# Altium PCB PCB.PcbDoc
Units mm, origin at the board's own origin, x right, y up, seen from the top; angles counter-clockwise.
Board outline 90 x 50 mm, 2 copper layers (Top Layer, Bottom Layer); 18 components, 14 nets, 63 pads, 2 vias.
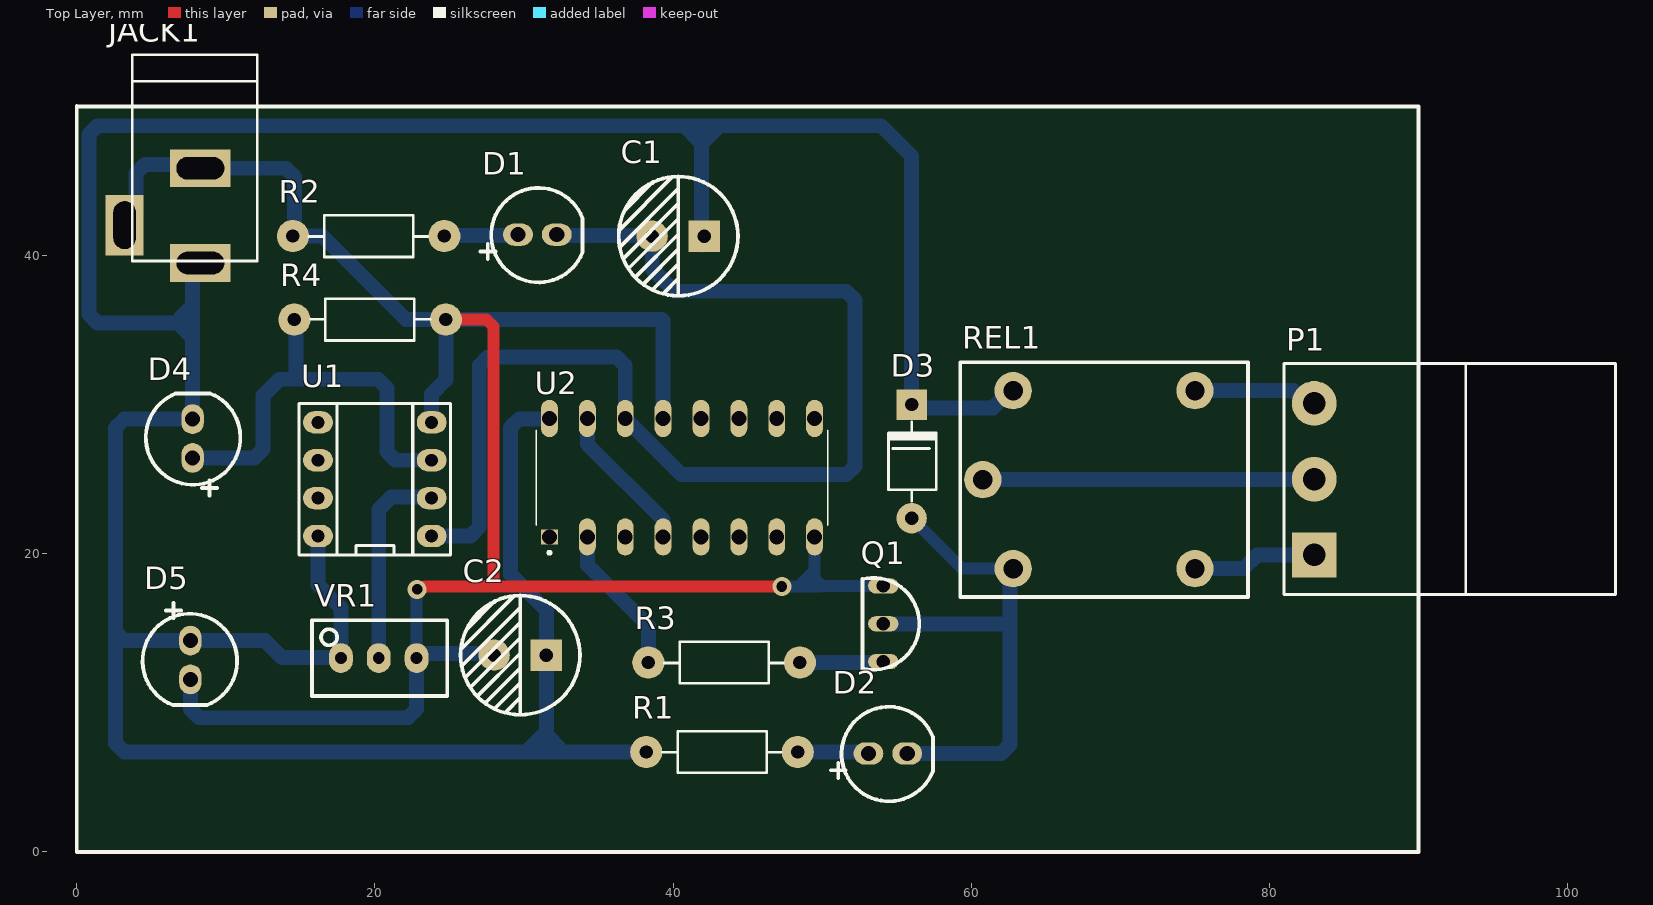
[diagram p0: Top Layer view]
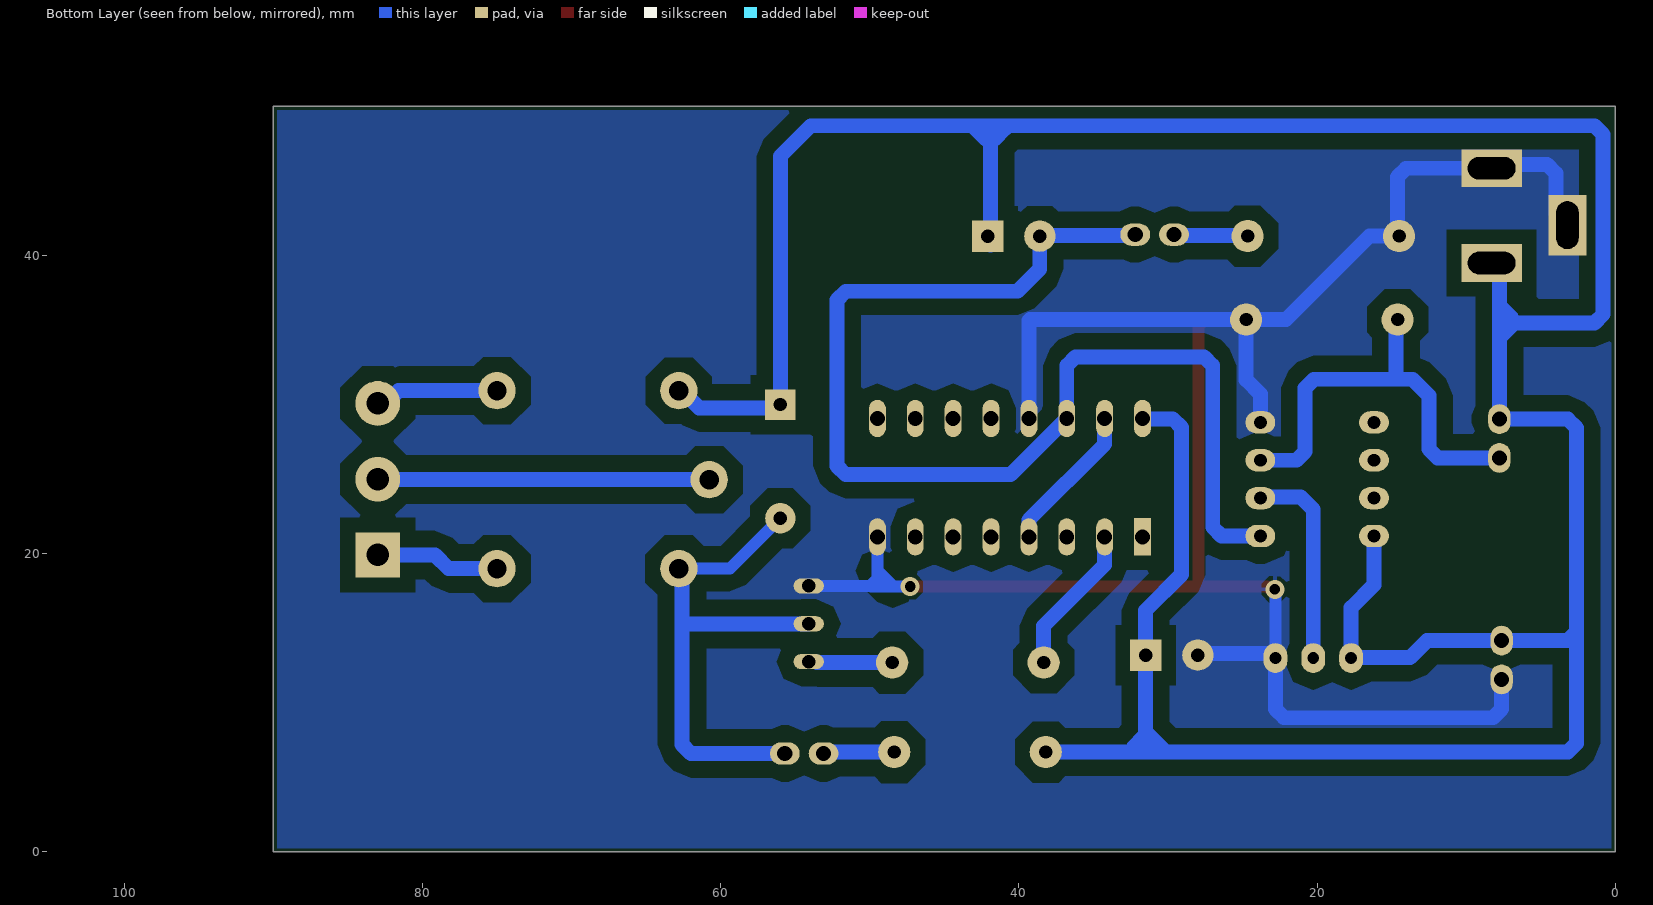
[diagram p1: Bottom Layer view, seen from below]
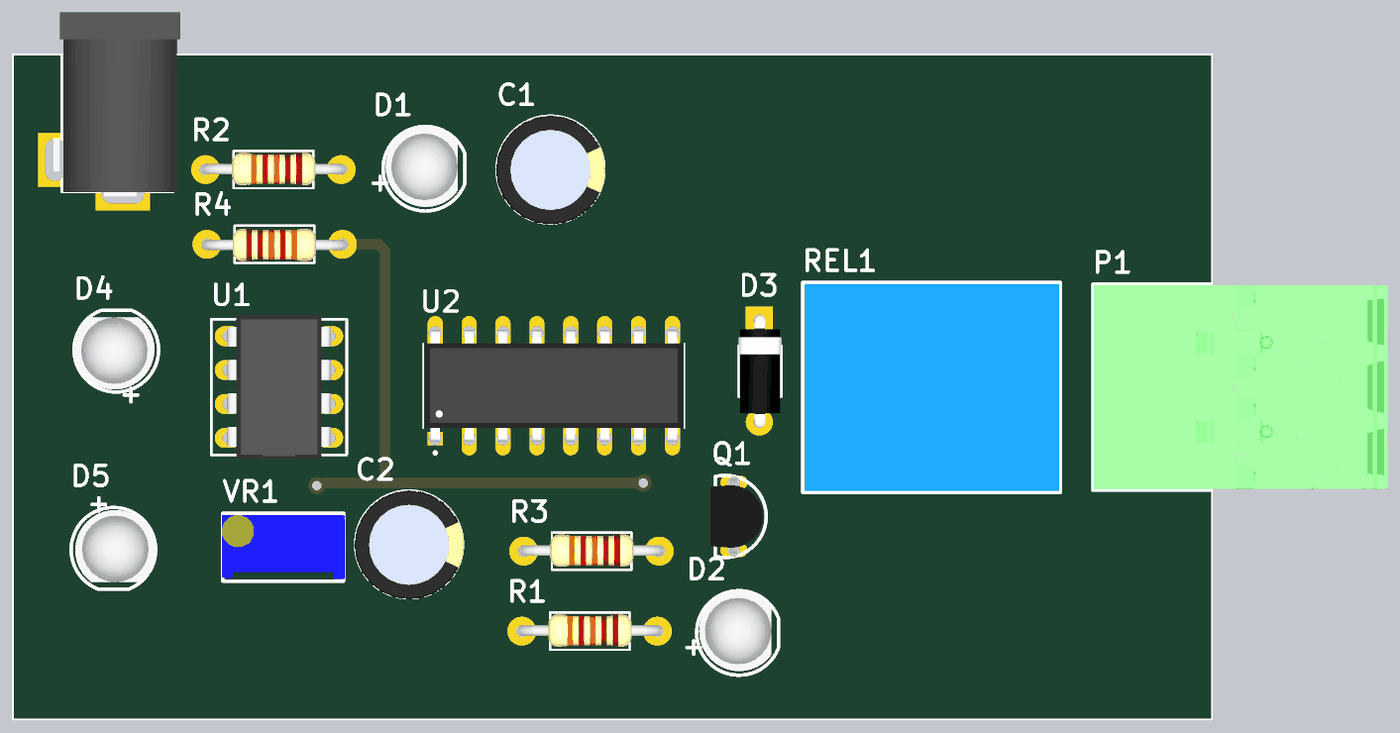
[diagram p2: 3D render of the assembled board from above, using the file's embedded part models]

## Layer stack, top to bottom
Top Solder: solder mask 0.0102, Solder Resist, Dk 3.5
Top Layer: signal copper 0.0356
Dielectric 1: dielectric 0.32, FR-4, Dk 4.8
Bottom Layer: signal copper 0.0356
Bottom Solder: solder mask 0.0102, Solder Resist, Dk 3.5

## Board outline
0,0 90,0 90,50 0,50

## Design rules (kind name [scope] priority, off if disabled: settings)
AssemblyTestPointUsage [All] p1: valid=2
AssemblyTestpoint [All] p1: testpointundercomponent=TRUE minsize=1.016 maxsize=2.54 preferedsize=1.524 minholesize=0 maxholesize=1.016 preferedholesize=0.813 testpointgrid=0.025 usegrid=FALSE gridtolerance=0 allowsidetop=TRUE allowsidebottom=TRUE
BoardOutlineClearance [All] p1: gap=0.254 ignorepadtopadclearanceinfootprint=FALSE except(0: Arc-SplitContinuation Track-SplitContinuation SMDPad-SplitContinuation THPad-SplitContinuation Via-SplitContinuation Fill-SplitContinuation Poly-SplitContinuation Region-SplitContinuation Text-SplitContinuation)
Clearance Clearance_1 [InNamedPolygon('NONET_L01_P-001')] p1: gap=1 ignorepadtopadclearanceinfootprint=FALSE
Clearance [All] p2: gap=0.254 ignorepadtopadclearanceinfootprint=FALSE
Clearance BREAKOUT [WithinRoom('CPU_10')or WithinRoom('CPU_11')or WithinRoom('CPU_12')or WithinRoom('CPU_13')or WithinRoom('CPU_15')or WithinRoom('CPU_16') or WithinRoom('CPU_17')or WithinRoom('CPU_4')or WithinRoom('CPU_7')or WithinRoom('CPU_8') or WithinRoom('CPU_9') or WithinRoom('CPU_3')or WithinRoom('CPU_5')or WithinRoom('CPU1')or WithinRoom('CPU2')] p3: gap=0.076 ignorepadtopadclearanceinfootprint=TRUE except(0.08: SMDPad-Fill SMDPad-Text SMDPad-Hole; 0.102: SMDPad-SMDPad SMDPad-THPad THPad-THPad; 0.114: Arc-Poly Track-SMDPad Track-THPad Track-Fill Track-Poly SMDPad-Via SMDPad-Poly SMDPad-Region THPad-Via THPad-Fill THPad-Poly THPad-Region THPad-Text THPad-Hole Via-Via Via-Region Fill-Poly Poly-Poly Poly-Region Poly-Text Poly-Hole; 0.117: Via-Fill Via-Poly)
Clearance GND_SGND [InNet('ETH1_GND')OR InNet('ETH2_GND') OR InNet('ETH3_GND')OR InNet('ETH4_GND') or InNet('RT_ETH_GND') vs InNet('GND')] p4: gap=0.6 ignorepadtopadclearanceinfootprint=TRUE
Clearance 50Ohm_GND_INNER [OnMid and (InNetClass('50SE') OR InNetClass('RGMII_50SE') OR InNetClass('SDCARD_50ohm')) vs InNet('GND')] p5: gap=0.102 ignorepadtopadclearanceinfootprint=TRUE
Clearance PCIe_85_GND_INNER [InNetClass('PCIE') And  OnMid vs InNet('GND')] p6: gap=0.152 ignorepadtopadclearanceinfootprint=TRUE
Clearance USB_90_GND_INNER [(InNetClass('USB_HS') OR InNetClass('USB_SS')) And  OnMid vs InNet('GND')] p7: gap=0.178 ignorepadtopadclearanceinfootprint=TRUE
Clearance ETH100_GND_INNER [OnMid and InNetClass('Ethernet') vs InNet('GND') or InNet('ETH1_GND')  or InNet('ETH2_GND') or InNet('ETH3_GND') or InNet('ETH4_GND') or InNet('RT_ETH_GND')] p8: gap=0.203 ignorepadtopadclearanceinfootprint=TRUE
Clearance 50Ohm_GND [InNetClass('50SE') OR InNetClass('RGMII_50SE') OR InNetClass('SDCARD_50ohm') vs InNet('GND')] p9: gap=0.127 ignorepadtopadclearanceinfootprint=TRUE
Clearance PCIe_85_GND [InNetClass('PCIE') vs InNet('GND')] p10: gap=0.203 ignorepadtopadclearanceinfootprint=TRUE
Clearance USB_90_GND [InNetClass('USB_HS') OR InNetClass('USB_SS') vs InNet('GND')] p11: gap=0.203 ignorepadtopadclearanceinfootprint=TRUE
Clearance ETH100_GND [InNetClass('Ethernet') vs InNet('GND') or InNet('ETH1_GND')  or InNet('ETH2_GND') or InNet('ETH3_GND') or InNet('ETH4_GND') or InNet('RT_ETH_GND')] p12: gap=0.203 ignorepadtopadclearanceinfootprint=FALSE
Clearance 50Ohm_OTHER_INNER [OnMid and (InNetClass('50SE') OR InNetClass('RGMII_50SE') OR InNetClass('SDCARD_50ohm'))] p13: gap=0.203 ignorepadtopadclearanceinfootprint=TRUE
Clearance PCIe_85_PCIe_85_INNER [InNetClass('PCIE') And  OnMid] p14: gap=0.239 ignorepadtopadclearanceinfootprint=TRUE
Clearance PCIe_85_OTHER_INNER [InNetClass('PCIE') And  OnMid vs Not InNetClass('PCIE')] p15: gap=0.239 ignorepadtopadclearanceinfootprint=TRUE
Clearance USB_90_USB90_INNER [(InNetClass('USB_HS') OR InNetClass('USB_SS')) And  OnMid] p16: gap=0.203 ignorepadtopadclearanceinfootprint=TRUE
Clearance USB_90_OTHER_INNER [(InNetClass('USB_HS') OR InNetClass('USB_SS')) And  OnMid vs Not (InNetClass('USB_HS') OR InNetClass('USB_SS'))] p17: gap=0.203 ignorepadtopadclearanceinfootprint=TRUE
Clearance ETH100_ETH100_INNER [InNetClass('Ethernet') And  OnMid] p18: gap=0.386 ignorepadtopadclearanceinfootprint=TRUE
Clearance ETH100_OTHER_INNER [InNetClass('Ethernet') And  OnMid vs Not InNetClass('Ethernet')] p19: gap=0.386 ignorepadtopadclearanceinfootprint=TRUE
Clearance 50Ohm_OTHER [InNetClass('50SE') OR InNetClass('RGMII_50SE') OR InNetClass('SDCARD_50ohm')] p20: gap=0.345 ignorepadtopadclearanceinfootprint=TRUE
Clearance PCIe_PCIe_85 [InNetClass('PCIE')] p21: gap=0.406 ignorepadtopadclearanceinfootprint=TRUE
Clearance PCIe_85_OTHER [InNetClass('PCIE') vs Not InNetClass('PCIE')] p22: gap=0.406 ignorepadtopadclearanceinfootprint=TRUE
Clearance USB_90_USB90 [InNetClass('USB_HS') OR InNetClass('USB_SS')] p23: gap=0.356 ignorepadtopadclearanceinfootprint=TRUE
Clearance USB_90_OTHER [InNetClass('USB_HS') OR InNetClass('USB_SS') vs Not (InNetClass('USB_HS') OR InNetClass('USB_SS'))] p24: gap=0.356 ignorepadtopadclearanceinfootprint=TRUE
Clearance ETH100_ETH100 [InNetClass('Ethernet')] p25: gap=0.559 ignorepadtopadclearanceinfootprint=TRUE
Clearance ETH100_OTHER [InNetClass('Ethernet') vs Not InNetClass('Ethernet')] p26: gap=0.559 ignorepadtopadclearanceinfootprint=TRUE
Clearance Default [All] p27: gap=0.114 ignorepadtopadclearanceinfootprint=TRUE except(0.127: Via-Via; 0.15: Track-SMDPad Track-THPad SMDPad-SMDPad SMDPad-THPad SMDPad-Via SMDPad-Poly SMDPad-Hole THPad-THPad THPad-Via THPad-Poly THPad-Hole)
ComponentClearance [All] p1: gap=0.3 collisioncheckmode=3 verticalgap=0.4 showdistances=TRUE checkcomponentboundary=TRUE
DiffPairsRouting BREAKOUT_2 [WithinRoom('CPU') or WithinRoom('CPU_1') or WithinRoom('CPU_2') or WithinRoom('CPU_4')or WithinRoom('CPU_6')or WithinRoom('CPU_7')or WithinRoom('CPU_8')or WithinRoom('CPU_9')or WithinRoom('CPU_10')or WithinRoom('CPU_11')or WithinRoom('CPU_12')or WithinRoom('CPU_13')or WithinRoom('CPU_14')or WithinRoom('CPU_15')or WithinRoom('CPU_16')] p1: maxlimit=0.076 minlimit=0.076 mostfreqgap=0.076 toplayer_minwidth=0.076 toplayer_maxwidth=0.203 toplayer_prefwidth=0.076 bottomlayer_minwidth=0.076 bottomlayer_maxwidth=0.203 bottomlayer_prefwidth=0.076 maxuncoupledlength=12.7
DiffPairsRouting 100_OHM_DIFF [InDifferentialPairClass('ETH0_100Diff')] p2: maxlimit=0.152 minlimit=0.152 mostfreqgap=0.152 toplayer_minwidth=0.14 toplayer_maxwidth=0.14 toplayer_prefwidth=0.14 bottomlayer_minwidth=0.14 bottomlayer_maxwidth=0.14 bottomlayer_prefwidth=0.14 maxuncoupledlength=12.7
DiffPairsRouting 90_OHM_DIFF [InDifferentialPairClass('USB_HS_90diff') OR InDifferentialPairClass('USB_sS_90diff')] p3: maxlimit=0.152 minlimit=0.152 mostfreqgap=0.152 toplayer_minwidth=0.178 toplayer_maxwidth=0.178 toplayer_prefwidth=0.178 bottomlayer_minwidth=0.178 bottomlayer_maxwidth=0.178 bottomlayer_prefwidth=0.178 maxuncoupledlength=12.7
DiffPairsRouting 85_OHM_DIFF [InDifferentialPairClass('PCIE_85Diff')] p4: maxlimit=0.152 minlimit=0.152 mostfreqgap=0.152 toplayer_minwidth=0.203 toplayer_maxwidth=0.203 toplayer_prefwidth=0.203 bottomlayer_minwidth=0.203 bottomlayer_maxwidth=0.203 bottomlayer_prefwidth=0.203 maxuncoupledlength=12.7
FabricationTestPointUsage [All] p1: valid=2 allowmultiple=FALSE
FabricationTestpoint [All] p1: side=3 testpointundercomponent=TRUE minsize=0.762 maxsize=2.54 preferedsize=1.524 minholesize=0 maxholesize=1.016 preferedholesize=0.813 testpointgrid=0.025 allowsidetop=TRUE allowsidebottom=TRUE usegrid=FALSE gridtolerance=0
MatchedLengths DiffPair_MatchedLengths [(InNetClass('DDR_100_OHM') or InNetClass('USB2D0') or InNetClass('USBWIFI'))] p1: tolerance=0.3 checknetsindiffpair=TRUE checkdiffpairvsdiffpair=FALSE checkxsignals=FALSE checkothers=FALSE
MinimumSolderMaskSliver [All] p1: minsoldermaskwidth=0.08
PlaneConnect [All] p1: planeconnectstyle=Direct reliefexpansion=0.508 reliefentries=4 reliefconductorwidth=0.254 reliefairgap=0.254
PolygonConnect PolygonConnect_4 [All vs IsNamedPolygon('NONET_L01_P-001')] p1: thpad.connectstyle=Direct thpad.reliefconductorwidth=0.254 thpad.reliefentries=4 thpad.polygonreliefangle="90 Angle" thpad.airgapwidth=0.254 smdpad.connectstyle=Direct smdpad.reliefconductorwidth=0.254 smdpad.reliefentries=4 smdpad.polygonreliefangle="90 Angle" smdpad.airgapwidth=0.254 via.connectstyle=Relief via.reliefconductorwidth=0.254 via.reliefentries=4 via.polygonreliefangle="90 Angle" via.airgapwidth=0.254
PolygonConnect PolygonConnect_3 [All vs IsNamedPolygon('NONET_L01_P-001')] p2: thpad.connectstyle=Direct thpad.reliefconductorwidth=0.254 thpad.reliefentries=4 thpad.polygonreliefangle="90 Angle" thpad.airgapwidth=0.254 smdpad.connectstyle=Direct smdpad.reliefconductorwidth=0.254 smdpad.reliefentries=4 smdpad.polygonreliefangle="90 Angle" smdpad.airgapwidth=0.254 via.connectstyle=Relief via.reliefconductorwidth=0.254 via.reliefentries=4 via.polygonreliefangle="90 Angle" via.airgapwidth=0.254
PolygonConnect PolygonConnect_2 [All vs IsNamedPolygon('NONET_L01_P-001')] p3: thpad.connectstyle=Direct thpad.reliefconductorwidth=0.254 thpad.reliefentries=4 thpad.polygonreliefangle="90 Angle" thpad.airgapwidth=0.254 smdpad.connectstyle=Direct smdpad.reliefconductorwidth=0.254 smdpad.reliefentries=4 smdpad.polygonreliefangle="90 Angle" smdpad.airgapwidth=0.254 via.connectstyle=Relief via.reliefconductorwidth=0.254 via.reliefentries=4 via.polygonreliefangle="90 Angle" via.airgapwidth=0.254
PolygonConnect PolygonConnect_1 [IsNamedPolygon('+12V')] p4: thpad.connectstyle=Relief thpad.reliefconductorwidth=0.8 thpad.reliefentries=4 thpad.polygonreliefangle="90 Angle" thpad.airgapwidth=0.3 smdpad.connectstyle=Direct smdpad.reliefconductorwidth=0.254 smdpad.reliefentries=4 smdpad.polygonreliefangle="90 Angle" smdpad.airgapwidth=0.254 via.connectstyle=Direct via.reliefconductorwidth=0.254 via.reliefentries=4 via.polygonreliefangle="90 Angle" via.airgapwidth=0.254
PolygonConnect [IsNamedPolygon('GND')] p5: thpad.connectstyle=Relief thpad.reliefconductorwidth=0.2 thpad.reliefentries=4 thpad.polygonreliefangle="90 Angle" thpad.airgapwidth=0.2 smdpad.connectstyle=Relief smdpad.reliefconductorwidth=0.2 smdpad.reliefentries=4 smdpad.polygonreliefangle="90 Angle" smdpad.airgapwidth=0.2 via.connectstyle=Direct via.reliefconductorwidth=0.254 via.reliefentries=4 via.polygonreliefangle="90 Angle" via.airgapwidth=0.254
PolygonConnect Default_1 [All] p6: thpad.connectstyle=Relief thpad.reliefconductorwidth=0.254 thpad.reliefentries=4 thpad.polygonreliefangle="90 Angle" thpad.airgapwidth=0.254 smdpad.connectstyle=Direct smdpad.reliefconductorwidth=0.254 smdpad.reliefentries=4 smdpad.polygonreliefangle="90 Angle" smdpad.airgapwidth=0.254 via.connectstyle=Direct via.reliefconductorwidth=0.254 via.reliefentries=4 via.polygonreliefangle="90 Angle" via.airgapwidth=0.254
RoomDefinition CPU_15 [False] p1: confinementstyle=ConfineIn formatcopy=TRUE lockcomponents=FALSE outline 146.384,70.439 157.129,70.439 157.129,58.369 146.384,58.369
RoutingVias Via550 [All] p1: holewidth=0.25 width=0.55 viastyle="Through Hole" minholewidth=0.25 minwidth=0.55 maxholewidth=0.25 maxwidth=0.55
SilkToSilkClearance [All] p1: silktosilkclearance=0.2
SilkToSolderMaskClearance [IsPad] p1: minsilkscreentomaskgap=0.01 clearancetoexposedcopper=TRUE
SolderMaskExpansion [IsVia] p1: expansion=0.1 istentingtop=TRUE soldermaskfromhole=TRUE
ViasUnderSMD [All] p1: allowed=FALSE
Width BREAKOUT_1 [WithinRoom('CPU') or WithinRoom('CPU_1') or WithinRoom('CPU_2') or WithinRoom('CPU_3') or WithinRoom('CPU_4') or WithinRoom('CPU_5')or WithinRoom('CPU_6')or WithinRoom('CPU_7')or WithinRoom('CPU_8')or WithinRoom('CPU_9')or WithinRoom('CPU_10')or WithinRoom('CPU_11')or WithinRoom('CPU_12')or WithinRoom('CPU_13')or WithinRoom('CPU_14')or WithinRoom('CPU_15')or WithinRoom('CPU_16')] p1: maxlimit=0.6 minlimit=0.089 preferedwidth=0.15 minimp=50.000000 maximp=50.000000 favimp=50.000000
Width 50_OHM [(InNetClass('50SE') Or InNetClass('RGMII_50SE') or InNetClass('SDCARD_50ohm'))] p2: maxlimit=0.2 minlimit=0.076 preferedwidth=0.173 bottomlayer_maxwidth=0.173 minimp=50.000000 maximp=50.000000 favimp=50.000000
Width [All] p3: maxlimit=0.8 minlimit=0.076 preferedwidth=0.2 minimp=50.000000 maximp=50.000000 favimp=50.000000
20 further rules are at their usual default settings.

## Classes and differential pairs
component class Sheet: C2 D1 D2 D3 D4 D5 JACK1 P1 Q1 R1 R2 R3 R4 REL1 U1 VR1

## Components (designator, comment, footprint, x,y, rotation, side; value= is the part's Value field where it differs from the comment)
C1 "100uF" "TU HOA 8mm" 40.35,41.3 r180 top
C2 "1000uF" "TU HOA 8mm" 29.75,13.2 r180 top
D1 "LED" "LED5MM RED" 30.875,41.375 r0 top
D2 "LED" "LED5MM RED" 54.375,6.575 r0 top
D3 "DIODE" "DIODE 1A" 56,21.11 r270 top
D4 "LED" "LED5MM RED" 7.8,27.7 r90 top
D5 "LED" "LED5MM RED" 7.6,12.9 r270 top
JACK1 "JACK DC" "JACK DC" 5.76,42.675 r270 top value="Jac DC"
P1 "CON 3 EDG5.08" "CON 3P 5.08MM" 83,19.92 r90 top
Q1 "NPN-TO92" TO-92 54.1,15.3 r270 top
R1 "220" RESISTOR 38.2,6.7 r0 top value="R1/4W - 1K"
R2 "220" RESISTOR 14.5,41.3 r0 top value="R1/4W - 1K"
R3 "220" RESISTOR 38.34,12.7 r0 top value="R1/4W - 1K"
R4 "10k" RESISTOR 24.76,35.7 r180 top value="R1/4W - 1K"
REL1 "RELAY 5V 10A" "RELAY 5V-10A" 60.776,24.969 r270 top
U1 "LM358" "DIP 8" 20,25 r90 top
U2 "CD4017" PDIP16 40.6,25.1 r90 top
VR1 "10K" RVAR 20.26,13 r0 top value="VR 10K"

## Footprints (in the part's own frame and the unit in brackets; to place one, negate y for a bottom-side part, rotate by r counter-clockwise, add the part's x,y. Pads: shape width x height; smd on the part's side, far side on the other; paste and mask are expansions set on the pad)
"CON 3P 5.08MM" [mm] "Connector; Header; 3 Position"
  rect 3x3 hole 1.5: 1(0,0)
  round 3 hole 1.5: 2(5.08,0) 3(10.16,0)
  silkscreen extent -2.67,-20.19 12.83,2.03, body extent -2.54,-20.1 12.7,1.94, height 15.17
"DIODE 1A" [mil] "Diode 1A"
  round 80 hole 35: 1(-50,0)
  rect 80x80 hole 35: 2(-350,0)
  silkscreen extent -305,-61 -95,65, body extent -366,-61 -34,65, height 122
"DIP 8" [mm] "W.300/L.400"
  oval 1.5x2 hole 0.864: 1(-3.81,-3.81) 2(-1.27,-3.81) 3(1.27,-3.81) 4(3.81,-3.81) 5(3.81,3.81) 6(1.27,3.81) 7(-1.27,3.81) 8(-3.81,3.81)
  silkscreen extent -5.08,-5.08 5.08,5.08, body extent -5.4,-3.88 5.4,3.88, height 4.5
"JACK DC" [mm] "Jac DC input"
  rect 2.54x4.064 hole 1.5 slot 3.2 at 90 deg: 1(3.175,2.54) 2(-3.175,2.54)
  rect 4.064x2.54 hole 1.5 slot 3.2 at 0 deg: 3(0.635,-2.54)
  silkscreen extent -10.8,-2.03 3.05,6.35, body extent -10.42,-2.67 3.4,6.84, height 11.02
"LED5MM RED" [mm] "Led de 5mm rojo"
  oval 2x1.5 hole 1.016: 1(-1.275,0.025) 2(1.325,0.025)
  silkscreen extent -3.81,-3.18 3.05,3.16, body extent -2.89,-2.88 2.54,3.14, height 12.31
PDIP16 [mm]
  rect 1x1.13 / inner round 1.13 / far side rect 2.5x1.13 hole 1: 1(-3.97,8.89)
  oval 2.5x1.13 hole 1: 2(-3.97,6.35) 3(-3.97,3.81) 4(-3.97,1.27) 5(-3.97,-1.27) 6(-3.97,-3.81) 7(-3.97,-6.35) 8(-3.97,-8.89) 9(3.97,-8.89) 10(3.97,-6.35) 11(3.97,-3.81) 12(3.97,-1.27) 13(3.97,1.27) 14(3.97,3.81) 15(3.97,6.35) 16(3.97,8.89)
  silkscreen extent -5.13,-9.77 3.17,9.77, body extent -4.15,-9.65 4.15,9.65, height 5.08
"RELAY 5V-10A" [mm]
  round 2.5 hole 1.3: 1(0,0) 2(-5.969,14.224) 3(5.969,14.224) 4(-5.969,2.032) 5(5.969,2.032)
  silkscreen extent -7.87,-1.52 7.87,17.78, body extent -7.75,-1.4 7.75,17.7, height 15.3
RESISTOR [mil] "R 1/2W, 2 pin, 300mil"
  round 85 hole 35: 1(0,0) 2(400,0)
  silkscreen extent 42,-55 356,55, body extent -12,-45 414,49, height 91
RVAR [mm] "Bien tro vi chinh"
  oval 1.6x2 hole 0.8: 1(-2.54,0) 2(0,0) 3(2.54,0)
  silkscreen extent -4.47,-2.54 4.6,2.54, body extent -4.54,-2.4 4.66,2.4, height 12.02
TO-92 [mil] "TO, Flat Index; 3 In-Line, Axial Leads; Body Dia. 4.8mm"
  oval 40x80 hole 35.43: 1(-100,0) 2(0,0) 3(100,0)
  silkscreen extent -121,-55 121,95, body extent -110,-70 110,85, height 402
"TU HOA 8mm" [mm]
  rect 2.1x2.1 hole 0.9: 1(-1.75,0)
  round 2.1 hole 0.9: 2(1.75,0)
  silkscreen extent -4,-4 4,4, body extent -4.1,-4.07 4.1,4.13, height 13.81

## Part data
C1 C2: library part CAPACITOR
P1: "Cắm", Chung_Loai=Cắm, Don_Vi=Con, Ma_Hang=MH000760, Ten_Linh_Kien="CON 3 2EDG5.08-3P 5.08MM ( Xanh Cong)"
R1 R2 R3 R4: library part RESISTOR
VR1: library part "VAR RES"

## Via types
v1: diameter 1.27, hole 0.711, Top Layer to Bottom Layer, tented both sides, 2 vias

## Nets (pads, with @x,y where several pads share a name; then routed paths per layer and width w, separated by ;. In a path a pad name is that pad's centre, name@x,y a point inside that pad or via, vN(x,y) a via of type N, cw(c..) or ccw(c..) an arc to the next point about the centre after c; other vN are vias at no path point)
+5: C1.1 C2.1 D3.2 D4.2 D5.1 JACK1.1 R1.1 REL1.4 U1.8 U2.16 VR1.1 | length 230.4
  Bottom Layer w1: JACK1.1 7.775,38.975 7.775,35.473 ; U1.8 16.19,17.91 17.72,16.38 VR1.1@17.72,13.038 ; VR1.1 VR1.1@17.72,13.038 ; 31.5,6.7 31.5,13.7 31.5,16.2 29.1,18.6 29.1,28.459 29.686,29.045 31.685,29.045 U2.16 ; R1.1@37.94,6.8 37.84,6.7 3.186,6.7 2.6,7.286 2.6,14.761 ; C1.1@41.9,40.705 41.9,48.7 ; D3.2@56,30.6 56,46.654 53.954,48.7 41.9,48.7 ; D3.2@56.2,30.2 D3.2 56.225,29.775 61.447,29.775 62.61,30.938 REL1.4 ; 2.6,14.761 3.186,14.175 D5.1 12.625,14.175 13.762,13.038 VR1.1@17.72,13.038 ; 2.6,14.761 2.6,28.439 3.186,29.025 D4.2 7.775,35.473 ; 7.775,35.473 1.4,35.473 0.814,36.059 0.814,48.114 1.4,48.7 41.9,48.7
GND: C2.2 D5.2 JACK1.2 JACK1.3 Q1.1 R2.1 R4.1 U1.4 U2.8 U2.13 VR1.3 | length 146.9
  Top Layer w0.8: v1(22.835,17.614) 22.925,17.704 23.257,17.704 23.353,17.8 27.959,17.8 ; R4.1 27.49,35.7 27.959,35.231 27.959,17.8 ; v1(47.3,17.8) 27.959,17.8
  Bottom Layer w0.8: v1@22.7,17.6 22.8,17.5 22.8,13.023 VR1.3 ; v1(47.3,17.8) 49.919,17.8 49.959,17.84 ; U2.8 49.49,18.309 49.959,17.84 ; Q1.1 49.959,17.84
  Bottom Layer w1: JACK1.3 3.99,42.81 3.99,45.514 4.576,46.1 8.05,46.1 JACK1.2 14.03,45.85 14.616,45.264 14.616,41.416 R2.1 16.5,41.3 22.1,35.7 R4.1 ; D5.2 7.625,9.586 8.211,9 22.214,9 22.8,9.586 VR1.3 ; VR1.3@22.8,13.023 23.077,13.3 27.6,13.3 C2.2@28,13.7 ; U1.4 23.81,30.71 24.76,31.66 R4.1 ; U2.13 39.33,35.63 39.26,35.7 R4.1 ; Q1.1@54.097,17.843 Q1.1
NetC1_2: C1.2 D1.2 U1.1 U2.14 | length 79.5
  Bottom Layer w1: U1.1 26.414,21.19 27,21.776 27,32.614 27.586,33.2 36.204,33.2 36.79,32.614 U2.14@36.79,29.105 ; D1.2 32.25,41.35 38.55,41.35 C1.2 38.6,39.1 40.1,37.6 51.614,37.6 52.2,37.014 52.2,25.886 51.614,25.3 40.56,25.3 U2.14@36.815,29.045
NetD1_1: D1.1 R2.2 | length 5.6
  Bottom Layer w1: R2.2@24.3,41.5 R2.2@24.45,41.35 ; R2.2 24.5,41.3 R2.2@24.45,41.35 ; D1.1 29.55,41.35 R2.2@24.45,41.35
NetD2_1: D2.1 R1.2 | length 5.1
  Bottom Layer w1: R1.2@48.1,6.8 48.204,6.696 53.004,6.696 D2.1
NetD2_2: D2.2 D3.1 Q1.2 REL1.5 | length 35.5
  Bottom Layer w0.8: D3.1 59.38,19 REL1.5
  Bottom Layer w1: Q1.2 62.4,15.3 ; D2.2 57.214,6.6 62,6.6 62.6,7.2 62.6,11.786 62.6,15.3 62.6,18.792 REL1.5
NetD4_1: D4.1 R4.2 U1.3 | length 29.2
  Bottom Layer w1: D4.1 11.914,26.425 12.5,27.011 12.5,30.6 13.6,31.7 14.7,31.7 ; R4.2@14.7,35.667 14.7,31.7 ; U1.3@23.906,26.366 U1.3 21.386,26.27 20.8,26.856 20.8,31.114 20.214,31.7 14.7,31.7
NetP1_1: P1.1 REL1.3 | length 8.4
  Bottom Layer w1: REL1.3 78.243,19 79.163,19.92 P1.1
NetP1_2: P1.2 REL1.1 | length 22.2
  Bottom Layer w1: REL1.1 60.792,24.985 82.985,24.985 P1.2
NetP1_3: P1.3 REL1.2 | length 8.4
  Bottom Layer w1: REL1.2 81.601,30.938 82.459,30.08 P1.3
NetQ1_3: Q1.3 R3.2 | length 5.6
  Bottom Layer w1: R3.2 53.528,12.7 53.585,12.757 54.036,12.757 Q1.3@54.04,12.753
NetR3_1: R3.1 U2.2 | length 10.1
  Bottom Layer w1: U2.2 34.25,19.25 38.34,15.16 R3.1
NetU1_2: U1.2 VR1.2 | length 13.9
  Bottom Layer w1: VR1.2 20.26,22.96 21.1,23.8 23.74,23.8 U1.2
NetU2_4: U2.4 U2.15 | length 10
  Bottom Layer w1: U2.15 34.25,27.35 39.33,22.27 U2.4
pads on no net: U1.5 U1.6 U1.7 U2.1 U2.3 U2.5 U2.6 U2.7 U2.9 U2.10 U2.11 U2.12
copper on no net: | length 10.1
  Bottom Layer w0.8: 7.529,34.599 6.895,35.233 6.895,35.895 7.2,36.2 7.8,36.8 ; 30.1,6.8 30.7,7.4 31.303,8.003 ; 31.751,7.749 32.401,7.099 ; 40.802,48.493 41.588,47.707 42.25,47.707 43.196,48.652 43.355,48.652 ; 48.461,17.861 49.461,18.861

## Polygon pours and split planes (outlines as drawn)
GND on Bottom Layer "NONET_L01_P-001" (solid, remove dead copper, pour order 0): -4.2,56.8 102.3,56.8 102.3,-18.7 99.7,-16.1 -7.5,-16.1 -7.5,53.5

## Silkscreen, mask and mechanical layers (free items; w line width, h text height)
Top Overlay:
  lines w0.254: 0,50 50,50 88,50 90,50 90,0 50,0 0,0 0,50.022